# EAGLE board breakout_rfm12b (EAGLE 5.11)
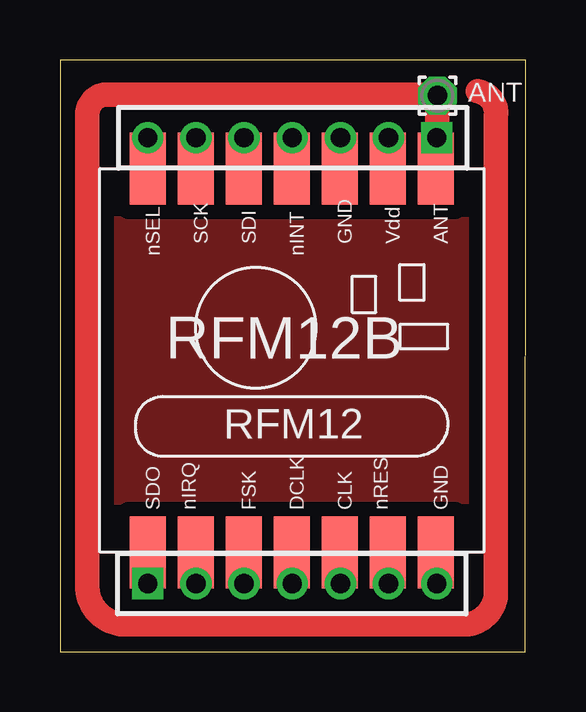
[diagram p0: board, top side]
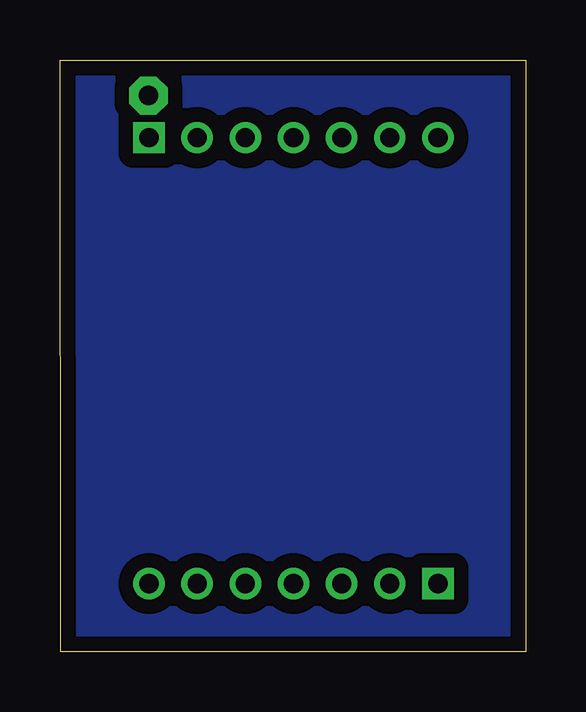
[diagram p1: board, bottom side, seen from below]

Size 19.41 x 24.68 mm. Coordinates in mm from the lower left corner, seen from the top.
Outline: 0,0 19.38,0 19.41,24.68 0,24.68 0,0
Copper layers (1*16): Top 0.035mm / dielectric 1.5mm / Bottom 0.035mm
Design rules "default *": minimum track width 10mil, minimum drill 24mil, track to track 8mil, track to pad 8mil, pad to pad 8mil, via to via 8mil, smd to smd 8mil, copper to edge 25mil, drill to drill 8mil, minimum pad ring 10mil, minimum via ring 8mil, stop-mask expansion 4mil, vias tented up to drill 0mil, thermal gap 10mil
Net classes: 1 power: width 0.381 mm, clearance 0.254 mm

## Footprints (pad centres in the part's own frame; a part is rotated, then mirrored left to right if it is on the bottom)
1,6/0,8 = drill 0.813 pad 1.6 octagon: 1 0,0
1X07 = drill 0.8 square: 1 0,0 | drill 0.8 round: 2 2.007,0; 3 4.013,0; 4 6.02,0; 5 8.026,0; 6 10.033,0; 7 12.04,0
RFM12 = smd 1.5 x 3: 1 -5,-10; 2 -3,-10; 3 -1,-10; 4 1,-10; 5 3,-10; 6 5,-10; 7 7,-10; 8 7,6; 9 5,6; 10 3,6; 11 1,6; 12 -1,6; 13 -3,6; 14 -5,6

## Placement (x,y rotation side)
ANT  [1,6/0,8]  15.72,23.19 0 top
LEFT  [1X07]  15.7,21.44 180 top
RIGHT  [1X07]  3.66,2.84 0 top
U$1  RFM12_SMDSMD  [RFM12]  8.66,14.15 0 top

## Library data of the parts
ANT = wirepad
LEFT RIGHT = M7_02mm
U$1 = rfm_12

## Nets
N$2: LEFT.7 U$1.14
N$3: LEFT.6 U$1.13
N$4: LEFT.5 U$1.12
N$5: LEFT.3 U$1.10
N$6: ANT.1 LEFT.1 U$1.8
N$7: RIGHT.1 U$1.1
N$8: RIGHT.2 U$1.2
N$9: RIGHT.7 U$1.7
N$10: LEFT.4 U$1.11
N$11: RIGHT.6 U$1.6
N$12: RIGHT.5 U$1.5
N$13: RIGHT.4 U$1.4
N$14: RIGHT.3 U$1.3
VDD: LEFT.2 U$1.9

## Tracks (layer width: path | path; a pad name or v marks a point on that pad's centre or on a via)
GND
  pour Bottom (isolate 0.61): 0,24.69 19.38,24.71 19.38,0.05 0,0.03
  pour Top (isolate 0.61): 0,24.69 19.38,24.69 19.38,0.05 0,0
N$2
  Top 0.813: U$1.14 3.63,20.15 LEFT.7
N$3
  Top 0.813: U$1.13 5.64,20.15 LEFT.6
N$4
  Top 0.813: U$1.12 7.64,20.15 LEFT.5
N$5
  Top 0.813: U$1.10 LEFT.3
N$6
  Top 0.813: U$1.8 15.67,20.15 LEFT.1
  Top 1.016: 17.4,23.37 arc-90 18.16,22.35 18.16,2.54 arc-90 16.89,1.14 2.67,1.14 arc-90 1.14,2.79 1.14,22.35 arc-90 1.91,23.24 15.72,23.24 ANT.1 15.72,21.44 LEFT.1
N$7
  Top 0.813: U$1.1 RIGHT.1
N$8
  Top 0.813: U$1.2 RIGHT.2
N$9
  Top 0.813: U$1.7 15.7,4.15 RIGHT.7
N$10
  Top 0.813: U$1.11 LEFT.4
N$11
  Top 0.813: U$1.6 13.69,4.15 RIGHT.6
N$12
  Top 0.813: U$1.5 11.68,4.15 RIGHT.5
N$13
  Top 0.813: U$1.4 9.68,4.15 RIGHT.4
N$14
  Top 0.813: U$1.3 7.67,4.15 RIGHT.3
VDD
  Top 0.813: U$1.9 LEFT.2

## Text on the board
tNames: RFM12B